# Altium PCB PCB_long_last_clock_v3_2022-12-24.pcbdoc
Units mil, origin at the board's own origin, x right, y up, seen from the top; angles counter-clockwise.
Board outline 2836.77 x 2194.41 mil, 2 copper layers (Top Layer, Bottom Layer); 34 components, 36 nets, 140 pads, 10 vias.
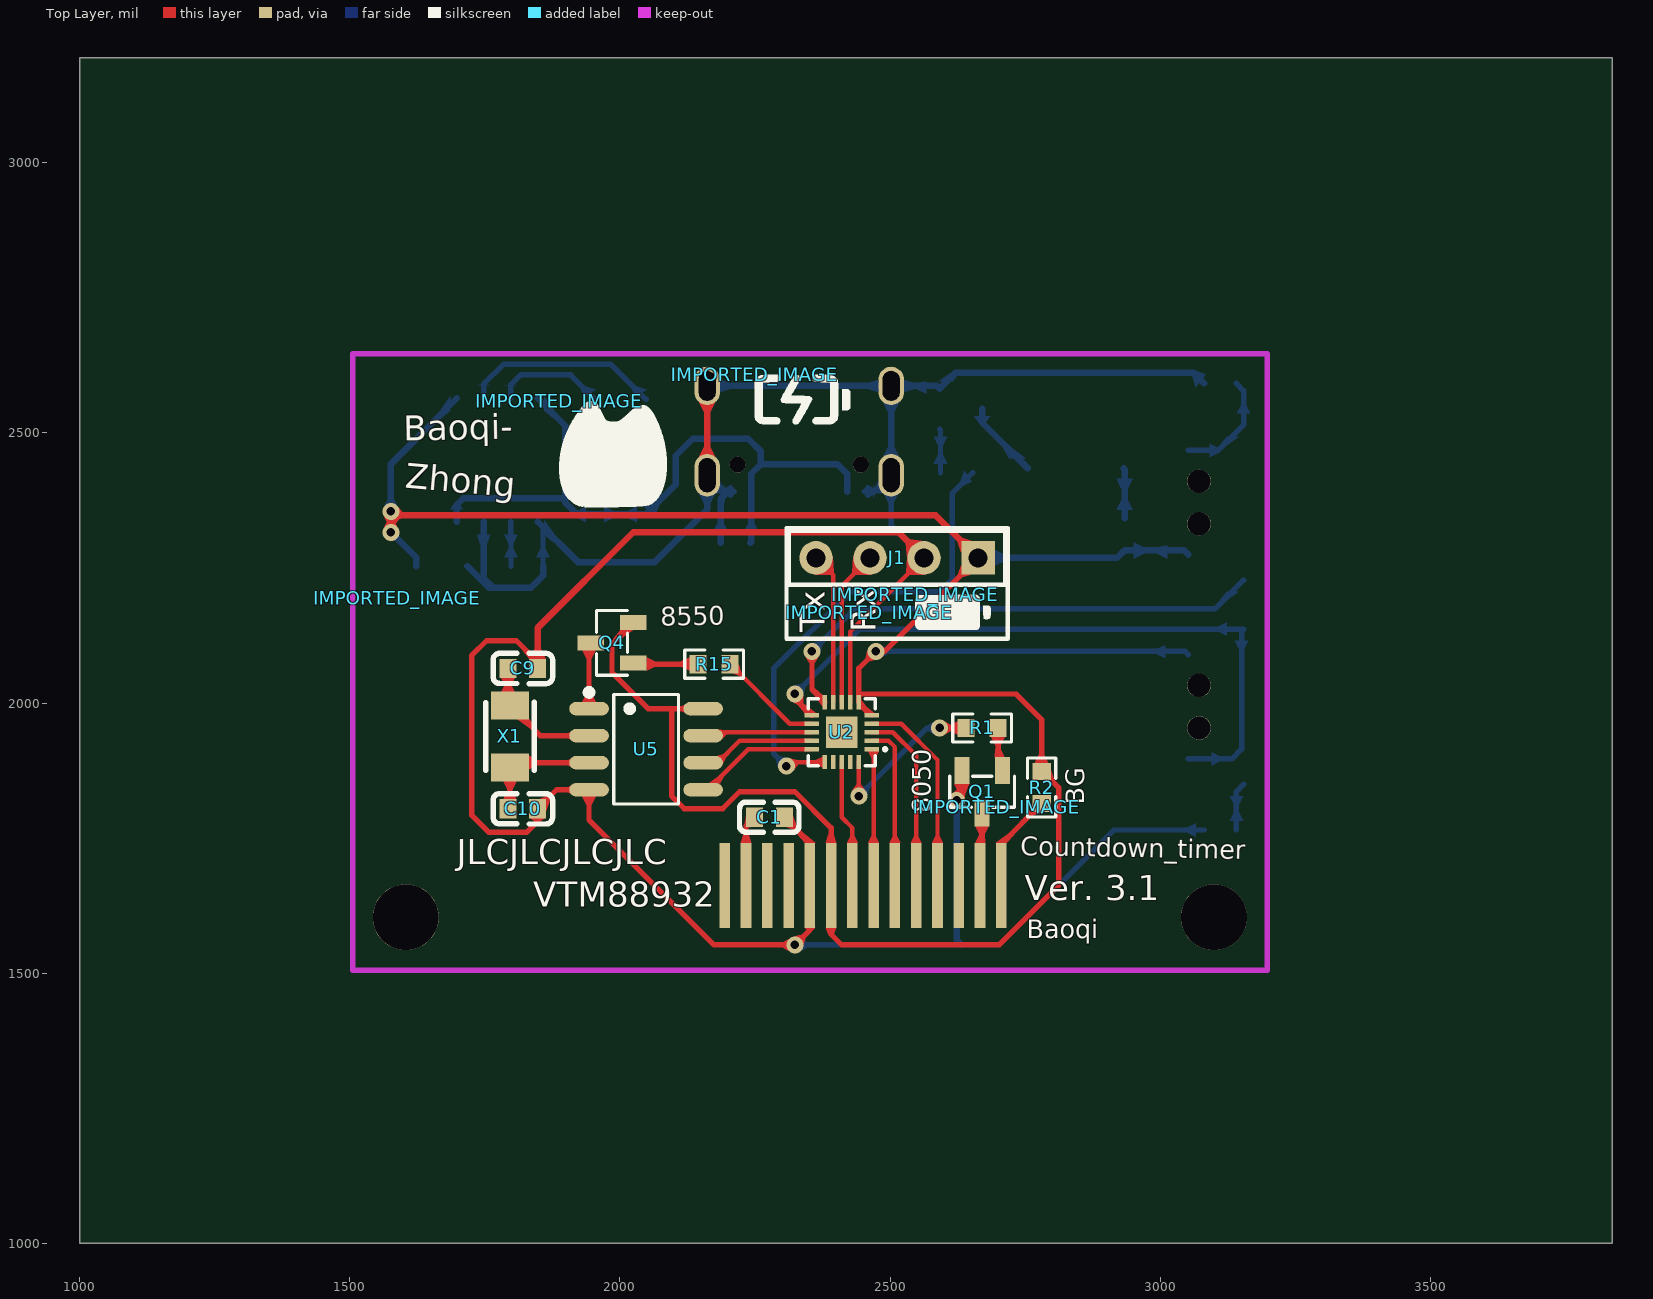
[diagram p0: Top Layer view]
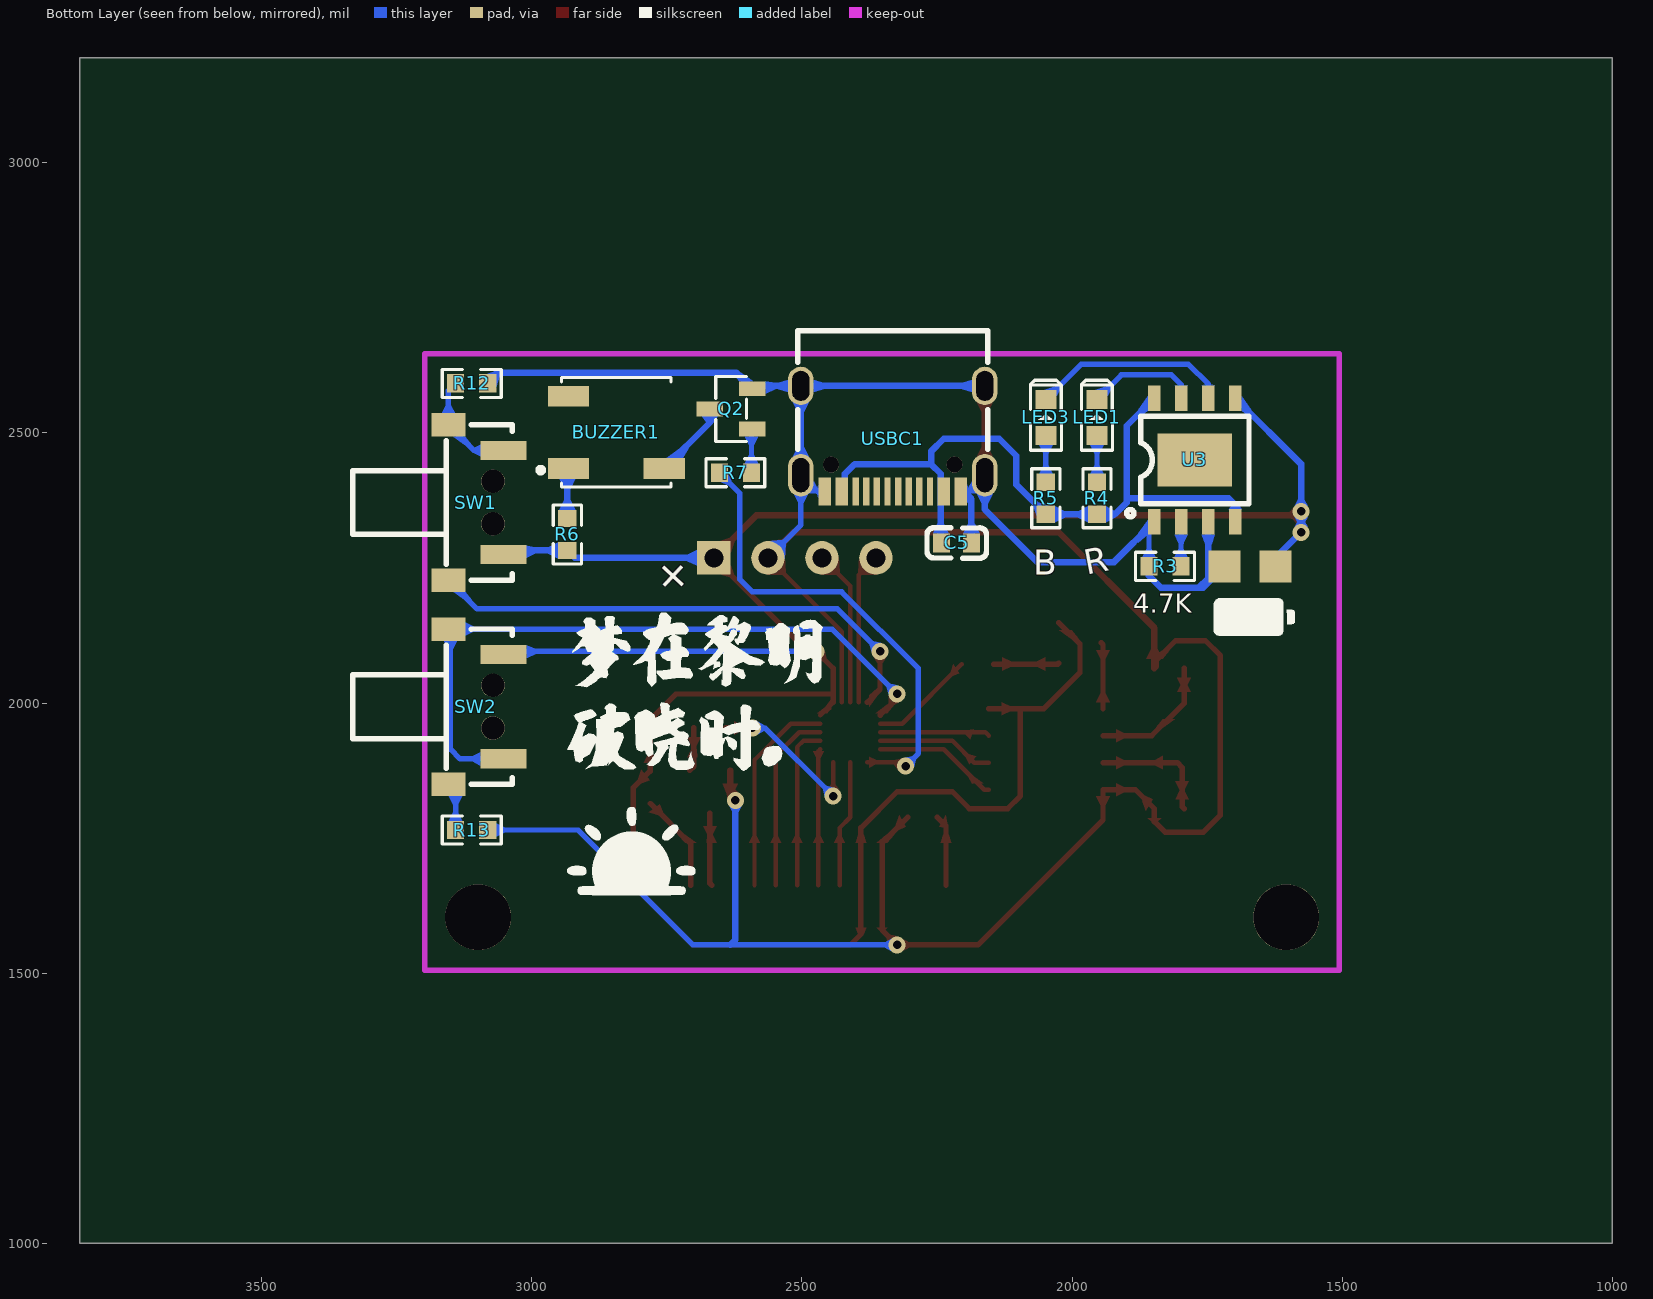
[diagram p1: Bottom Layer view, seen from below]

## Layer stack, top to bottom
Top Layer: signal copper (thickness not stored)
Dielectric: dielectric 12.6, FR-4, Dk 4.8
Bottom Layer: signal copper (thickness not stored)

## Board outline
3836.77,1000 1000,1000 1000,3194.41 3836.77,3194.41

## Components (designator, comment, footprint, x,y, rotation, side; value= is the part's Value field where it differs from the comment)
BUZZER1 "KLJ-5020" BUZ-SMD_4P-L5.0-W5.0-P3.80-TL 2843.58,2501.06 r0 bottom
C1 "0.1u" C0603#1 2276.65,1788.46 r0 top
C5 "1u" C0603#2 2213.66,2296.34 r180 bottom
C9 "6pF" C0603#1 1819.96,2064.05 r180 top
C10 "6pF" C0603#1 1819.96,1804.21 r180 top
IMPORTED_IMAGE "IMPORTED_IMAGE" IMPORTED_IMAGE 1887.54,2558.98 r0 top
IMPORTED_IMAGE "IMPORTED_IMAGE" IMPORTED_IMAGE 2546.2,2200.19 r0 top
IMPORTED_IMAGE "IMPORTED_IMAGE" IMPORTED_IMAGE 2249.09,2607.36 r0 top
IMPORTED_IMAGE "IMPORTED_IMAGE" IMPORTED_IMAGE 2461.69,2166.81 r0 top
IMPORTED_IMAGE "IMPORTED_IMAGE" IMPORTED_IMAGE 2697.36,1807.1 r0 top
IMPORTED_IMAGE "IMPORTED_IMAGE" IMPORTED_IMAGE 1587.57,2194.31 r0 top
J1 "HDR-M-2.54_1x4" HDR-M-2.54_1X4 2512.87,2268.78 r180 top
LED1 "LED-0603_R" LED0603_RED 1953.82,2528.62 r270 bottom
LED3 "LED-0603_B" LED0603_BLUE 2048.31,2528.62 r270 bottom
Q1 "S8050" SOT-23-3_L2.9-W1.3-P1.90-LS2.4-BR#1 2670.35,1835.71 r90 top
Q2 "S8050" SOT-23-3_L2.9-W1.3-P1.90-LS2.4-BR#2 2630.98,2544.37 r0 bottom
Q4 "S8550" SOT-23-3_L2.9-W1.3-P1.90-LS2.4-BR#1 1985.31,2111.3 r0 top
R1 "1k" R0603#1 2670.35,1953.82 r180 top
R2 "1k" R0603#1 2780.59,1843.58 r90 top
R3 "1k" R0603#2 1827.83,2253.03 r0 bottom
R4 "1k" R0603#2 1953.82,2379.01 r90 bottom
R5 "1k" R0603#2 2048.31,2379.01 r90 bottom
R6 "10" R0603#2 2934.13,2312.09 r270 bottom
R7 "1k" R0603#2 2623.11,2426.26 r0 bottom
R12 "1k" R0603#2 3111.3,2591.61 r0 bottom
R13 "1k" R0603#2 3111.3,1764.84 r0 bottom
R15 "1K" R0603#1 2174.29,2071.93 r0 top
SW1 "TS-B010" SW-SMD_TS-B010_8.3 3016.81,2371.14 r270 bottom
SW2 "TS-B010" SW-SMD_TS-B010_8.3 3016.81,1993.19 r270 bottom
U2 "STC8H1K08-36I-QFN20" QFN-20_L3.0-W3.0-P0.40-BL-EP1.7 2410.51,1945.94 r90 top
U3 "TP4056_C725790" ESOP-8_L4.9-W3.9-P1.27-LS6.0-BL-EP 1772.72,2449.88 r0 bottom
U5 "DS1302" SOP-8_L4.9-W3.9-P1.27-LS6.0-BL 2048.31,1914.45 r270 top
USBC1 "TYPE-C-31-M-12" USB-C_SMD-TYPE-C-31-M-12 2331.77,2489.25 r180 bottom
X1 "32.768kHz" CRYSTAL-SMD_L3.2-W1.5 1796.34,1938.07 r90 top

## Footprints (in the part's own frame and the unit in brackets; to place one, negate y for a bottom-side part, rotate by r counter-clockwise, add the part's x,y. Pads: shape width x height; smd on the part's side, far side on the other; paste and mask are expansions set on the pad)
BUZ-SMD_4P-L5.0-W5.0-P3.80-TL [mm]
  rect 1.945x0.98 smd: 1(2.248,1.7) 2(-2.247,1.7) 3(2.248,-1.7)
  silkscreen extent -2.58,-2.58 3.68,2.58
C0603#1 [mm]
  rect 0.8x0.9 smd: 1(-0.7,0) 2(0.7,0)
  silkscreen extent -1.41,-0.71 1.39,0.72
C0603#2 [mm]
  rect 0.8x0.9 smd: 1(0.7,0) 2(-0.7,0)
  silkscreen extent -1.39,-0.72 1.41,0.71
CRYSTAL-SMD_L3.2-W1.5 [mm]
  rect 1.3x1.8 smd: 1(-1.458,0) 2(1.458,0)
  silkscreen extent -1.6,-1.14 1.6,1.14
ESOP-8_L4.9-W3.9-P1.27-LS6.0-BL-EP [mm]
  rect 0.6x1.2 smd: 1(1.905,2.908) 2(0.635,2.908) 3(-0.635,2.908) 4(-1.905,2.908) 5(-1.905,-2.908) 6(-0.635,-2.908) 7(0.635,-2.908) 8(1.905,-2.908)
  rect 3.5x2.5 smd: 9(0,0)
  silkscreen extent -2.55,-2.05 3.2,2.67
HDR-M-2.54_1X4 [mil]
  rect 62x62 hole 35: 1(-150,0)
  round 62 hole 35: 2(-50,0) 3(50,0) 4(150,0)
  silkscreen extent -200,-50 200,50
IMPORTED_IMAGE [mil]
  silkscreen extent 0,-197 199,0
LED0603_BLUE [mm]
  rect 0.9x1 smd: 1(0.85,0) 2(-0.85,0)
  silkscreen extent -1.75,-0.73 1.54,0.73
LED0603_RED [mm]
  rect 0.9x1 smd: 1(0.85,0) 2(-0.85,0)
  silkscreen extent -1.75,-0.73 1.54,0.73
QFN-20_L3.0-W3.0-P0.40-BL-EP1.7 [mm]
  rect 0.2x0.665 smd: 1(-0.8,-1.407) 2(-0.4,-1.407) 3(0,-1.407) 4(0.4,-1.407) 5(0.8,-1.407) 11(0.8,1.407) 12(0.4,1.407) 13(0,1.407) 14(-0.4,1.407) 15(-0.8,1.407)
  rect 0.665x0.2 smd: 6(1.407,-0.8) 7(1.407,-0.4) 8(1.407,0) 9(1.407,0.4) 10(1.407,0.8) 16(-1.407,0.8) 17(-1.407,0.4) 18(-1.407,0) 19(-1.407,-0.4) 20(-1.407,-0.8)
  rect 1.5x1.5 smd: 21(0,0)
  silkscreen extent -1.58,-2.12 1.58,1.58
R0603#1 [mil]
  rect 31.75x34.02 smd: 1(-29.66,0) 2(29.65,0)
  silkscreen extent -55,-26 55,26
R0603#2 [mil]
  rect 31.75x34.02 smd: 1(29.65,0) 2(-29.65,0)
  silkscreen extent -55,-26 55,26
SOP-8_L4.9-W3.9-P1.27-LS6.0-BL [mm]
  oval 0.63x1.865 smd: 1(-1.905,-2.682) 2(-0.635,-2.682) 3(0.635,-2.682) 4(1.905,-2.682) 5(1.905,2.682) 6(0.635,2.682) 7(-0.635,2.682) 8(-1.905,2.682)
  silkscreen extent -2.82,-2.83 2.58,1.52
SOT-23-3_L2.9-W1.3-P1.90-LS2.4-BR#1 [mm]
  rect 1.25x0.7 smd: 1(1,-0.95) 2(1,0.95) 3(-1,0)
  silkscreen extent -0.73,-1.53 0.73,1.53
SOT-23-3_L2.9-W1.3-P1.90-LS2.4-BR#2 [mm]
  rect 1.25x0.7 smd: 1(-1,0.95) 2(-1,-0.95) 3(1,0)
  silkscreen extent -0.73,-1.53 0.73,1.53
SW-SMD_TS-B010_8.3 [mm]
  rect 0.9x2.159 smd: 1(2.45,-0.9) 2(-2.45,-0.9)
  rect 1.1x1.6 smd: 3(3.65,-3.5) 4(-3.65,-3.5)
  round 1.1 hole 1.1 unplated: ""(-1,-1.4) ""(1,-1.4)
  silkscreen extent -3.65,-8 3.65,-0.5
USB-C_SMD-TYPE-C-31-M-12 [mm]
  oval 1.2x2 hole 0.8 slot 1.6 at 90 deg: 0(-4.325,-1.716) 0(4.325,-1.716)
  oval 1.2x1.8 hole 0.8 slot 1.4 at 90 deg: 0(-4.325,2.484) 0(4.325,2.484)
  rect 0.3x1.3 smd: A1(3.35,-2.484) A4(2.55,-2.484) A5(1.25,-2.484) A6(0.25,-2.484) A7(-0.25,-2.484) A8(-1.25,-2.484) A9(-2.55,-2.484) A12(-3.35,-2.484) B1(-3.05,-2.484) B4(-2.25,-2.484) B5(-1.75,-2.484) B6(-0.75,-2.484) B7(0.75,-2.484) B8(1.75,-2.484) B9(2.25,-2.484) B12(3.05,-2.484)
  round 0.75 hole 0.75 unplated: ""(-2.9,-1.216) ""(2.9,-1.216)
  silkscreen extent -4.47,-0.5 4.47,5.08

## Free pads (board coordinates)
  rect 59.05x59.05 smd far side: 1(1623.11,2253.03) 1(1717.6,2253.03)
  rect 19.68x157.48 smd: 1(2705.79,1662.48) 2(2666.42,1662.48) 3(2627.05,1662.48) 4(2587.68,1662.48) 5(2548.3,1662.48) 6(2508.93,1662.48) 7(2469.57,1662.48) 8(2430.2,1662.48) 9(2390.82,1662.48) 10(2351.45,1662.48) 11(2312.09,1662.48) 12(2272.72,1662.48) 13(2233.34,1662.48) 14(2193.97,1662.48)
  round 122.05 hole 122.05 unplated: ""(1603.43,1603.42) ""(3099.49,1603.42)

## Via types
v1: diameter 31.5, hole 15.75, Top Layer to Bottom Layer, tented both sides, 10 vias

## Nets (pads, with @x,y where several pads share a name; then routed paths per layer and width w, separated by ;. In a path a pad name is that pad's centre, name@x,y a point inside that pad or via, vN(x,y) a via of type N, cw(c..) or ccw(c..) an arc to the next point about the centre after c; other vN are vias at no path point)
BTN1: SW1.3 U2.10 | length 957.8
  Top Layer w10: v1(2355.39,2095.55) 2355.4,2024.95 U2.10
  Bottom Layer w10: v1(2355.39,2095.55) 2434.1,2174.25 3101.5,2174.25 SW1.3
BTN2: SW2.1 SW2.4 U2.11 | length 1262.5
  Top Layer w10: v1(2323.9,2016.81) 2323.9,2008.65 U2.11
  Bottom Layer w10: v1(2323.9,2016.81) 2444,2136.85 3154.6,2136.85 3150.7,2132.95 3150.7,1914.45 3132.9,1896.75 SW2.1@3052.2,1896.75
BUZZER: R7.1 U2.16 | length 876.5
  Top Layer w8: v1@2308.1,1882.95 2315.7,1890.55 U2.16@2379,1890.55
  Bottom Layer w10: v1@2308.1,1882.95 2284.5,1906.55 2284.5,2064.05 2426.3,2205.75 2591.6,2205.75 2615.2,2229.45 2615.2,2388.75 R7.1@2652.8,2426.25
  other v1: 2308.15,1882.95
BUZZER1_1: BUZZER1.1 R6.2 | length 93.2
  Bottom Layer w12: BUZZER1.1@2932.1,2434.15 2934.1,2432.05 R6.2@2934.1,2341.75
BUZZER1_2: BUZZER1.2 Q2.3 | length 145.3
  Bottom Layer w12: Q2.3 2670.4,2518.85 BUZZER1.2@2755.1,2434.15
C1_1: C1.1 pad.13 | length 132.6
  Top Layer w10: pad.13@2233.3,1662.45 2233.3,1772.75 C1.1@2249.1,1788.45
C9_2: C9.2 U5.2 X1.2 | length 239.8
  Top Layer w10: C9.2@1792.4,2064.05 1792.4,1999.45 1796.3,1995.45 1852.4,1939.45 U5.2
C10_2: C10.2 U5.3 X1.1 | length 228.1
  Top Layer w10: C10.2 1796.3,1808.15 1796.3,1880.65 1805.1,1889.45 U5.3
DS1302_CE: U2.15 U5.5 | length 232.3
  Top Layer w8: U5.5 2162.3,1839.45 2237.3,1914.45 U2.15
DS1302_CLK: U2.13 U5.7 | length 203.9
  Top Layer w8: U5.7 2160.4,1945.95 U2.13@2355.1,1945.95
DS1302_DAT: U2.14 U5.6 | length 218.1
  Top Layer w8: U5.6 2180.8,1889.45 2221.5,1930.15 U2.14
DS1302_VCC: R15.2 U2.12 | length 196.8
  Top Layer w8: R15.2@2204,2071.95 2314.2,1961.65 U2.12@2355.1,1961.65
GND: C1.2 C5.1 C9.1 C10.1 J1.2 pad.1@1717.6,2253.03 pad.10 Q1.2 Q2.2 R3.1 R12.2 R13.2 U2.7 U3.1 U3.3 U5.4 USBC1.0 USBC1.A1 USBC1.A12 USBC1.B1 USBC1.B12 | length 6512
  Top Layer w8: U2.7 2426.3,2132.15 J1.2
  Top Layer w10: C9.1@1847.5,2064.05 1843.6,2067.95 1843.6,2079.85 1808.1,2115.25 1753,2115.25 1725.5,2087.65 1725.5,1792.45 1757,1760.95 1827.8,1760.95 1847.5,1780.55 C10.1 1882.8,1839.45 U5.4 1942.7,1783.85 2174.3,1552.25 v1(2323.9,1552.24) 2351.5,1579.75 2351.5,1662.45 2351.5,1741.25 C1.2@2304.2,1788.45
  Top Layer w12: C9.1@1847.5,2064.05 1847.5,2138.85 2024.7,2316.05 2515.6,2316.05 J1.2 ; USBC1.0@2161.5,2421.65 USBC1.0@2161.5,2587.05 ; v1(2623.11,1819.96) 2633,1829.85 Q1.2@2633,1875.05
  Bottom Layer w10: U3.1 1857.5,2325.65 R3.1 ; USBC1.0@2161.5,2421.65 2191.7,2391.45 USBC1.B12 ; v1(2323.9,1552.24) 2701.8,1552.25 2914.4,1764.85 R13.2 ; USBC1.B1@2451.9,2391.45 2471.8,2391.45 2502.1,2421.65 2502.1,2329.65 J1.2
  Bottom Layer w12: pad.1@1717.6,2253.03 1756.98,2213.65 1835.7,2213.65 ; U3.3 1747.7,2230.75 1764.8,2213.65 1835.7,2213.65 ; U3.1 1922.2,2260.95 2064.1,2260.95 2161.5,2358.35 USBC1.0@2161.5,2421.65 ; R3.1 1857.5,2235.45 1835.7,2213.65 ; USBC1.0@2161.5,2587.05 USBC1.0@2502.1,2587.05 ; C5.1@2186.1,2296.35 2186.1,2377.65 USBC1.A1@2199.9,2391.45 ; USBC1.0@2502.1,2421.65 USBC1.0@2502.1,2587.05 ; v1(2623.11,1819.96) 2623.11,1561.66 2632.53,1552.24 ; R12.2 3061.9,2611.25 2621.1,2611.25 Q2.2 2586.3,2587.05 USBC1.0@2502.1,2587.05
LED1_2: LED1.2 U3.7 | length 207.1
  Bottom Layer w10: U3.7 1797.7,2589.05 1816,2607.35 1908.5,2607.35 LED1.2@1953.8,2562.05
LED3_1: LED3.1 R5.1 | length 86.5
  Bottom Layer w10: R5.1@2048.3,2408.65 LED3.1
LED3_2: LED3.2 U3.6 | length 368.7
  Bottom Layer w10: U3.6 1747.7,2590.25 1784.5,2627.05 1983.3,2627.05 LED3.2@2048.3,2562.05
Q1_3: pad.2 Q1.3 | length 135.6
  Top Layer w10: pad.2@2666.4,1662.45 2670.4,1666.45 Q1.3@2670.4,1796.35
Q2_1: Q2.1 R7.2 | length 81.4
  Bottom Layer w10: Q2.1 2593.4,2505.15 R7.2@2593.4,2426.25
Q4_3: Q4.3 U5.1 | length 123.1
  Top Layer w10: U5.1 1942.7,2108.05 Q4.3@1945.9,2111.25
R1_1: Q1.1 R1.1 | length 82
  Top Layer w10: R1.1 2700,1882.85 Q1.1@2707.8,1875.05
R2_1: pad.1@2705.79,1662.48 R2.1 | length 182.5
  Top Layer w10: pad.1@2705.8,1662.45 2705.8,1739.15 R2.1@2780.6,1813.95
R3_2: R3.2 U3.2 | length 82.3
  Bottom Layer w10: U3.2 R3.2
R4_1: LED1.1 R4.1 | length 86.5
  Bottom Layer w10: R4.1@1953.8,2408.65 LED1.1
R15_1: Q4.1 R15.1 | length 120.7
  Top Layer w10: Q4.1@2024.7,2073.85 2026.7,2071.95 R15.1@2144.6,2071.95
RX: J1.3 U2.8 | length 289.1
  Top Layer w8: U2.8 2410.5,2216.45 J1.3
SCREEN_BG: R1.2 U2.20 | length 313.6
  Top Layer w8: v1(2442.01,1827.83) U2.20@2442,1890.55
  Top Layer w10: v1(2591.61,1953.82) R1.2
  Bottom Layer w10: v1(2442.01,1827.83) 2568,1953.82 v1(2591.61,1953.82)
SCREEN_CS: pad.4 U2.4 | length 381.8
  Top Layer w8: U2.4@2465.9,1961.65 2520.7,1961.65 2587.7,1894.75 pad.4@2587.7,1662.45
SCREEN_DC: pad.6 U2.2 | length 303.8
  Top Layer w8: U2.2 2497.1,1930.15 2508.9,1918.35 pad.6@2508.9,1662.45
SCREEN_RST: pad.5 U2.3 | length 340.5
  Top Layer w8: U2.3@2465.9,1945.95 2505,1945.95 2548.3,1902.65 pad.5@2548.3,1662.45
SCREEN_SCL: pad.7 U2.1 | length 253.6
  Top Layer w8: U2.1 2469.6,1910.85 pad.7@2469.6,1662.45
SCREEN_SDA: pad.8 U2.18 | length 236.3
  Top Layer w8: U2.18@2410.5,1890.55 2410.5,1788.45 2430.2,1768.75 pad.8@2430.2,1662.45
SW1_2: R12.1 SW1.2 SW1.4 | length 204.4
  Bottom Layer w10: SW1.2 3107.4,2467.65 SW1.4 3154.6,2577.95 R12.1
SW2_3: R13.1 SW2.3 | length 90.2
  Bottom Layer w10: R13.1 3141,1835.85 SW2.3@3154.6,1849.45
TX: J1.4 U2.9 | length 280.6
  Top Layer w8: J1.4 2394.8,2236.85 U2.9
VBAT: J1.1 pad.1@1623.11,2253.03 pad.9 Q4.2 R2.2 R6.1 SW1.1 SW2.2 U2.5 U2.6 U3.5 U5.8 | length 5141.8
  Top Layer w8: U2.6 U2.5
  Top Layer w10: Q4.2@2024.7,2148.65 1985.3,2109.35 1985.3,2056.15 2052,1989.45 U5.8 ; 2095.5,1989.45 2095.5,1827.85 2119.2,1804.25 2190.1,1804.25 2221.6,1835.75 2323.9,1835.75 2390.8,1768.85 2390.8,1662.45 2390.8,1571.95 2410.5,1552.25 2701.8,1552.25 2812.1,1662.45 2812.1,1843.55 2782.4,1873.25 R2.2 2780.6,1969.55 2733.4,2016.75 2442,2016.75 ; U2.6 2442,2064.05 v1(2473.5,2095.55) 2489.6,2095.55 J1.1
  Top Layer w12: v1(1575.87,2315.96) v1(1575.87,2354.63) 1582.94,2347.55 1607.4,2347.55 ; v1(1575.87,2315.96) 1575.9,2331.75 1591.6,2347.55 2584.1,2347.55 J1.1
  Bottom Layer w10: v1(2473.5,2095.55) 3046.3,2095.55 SW2.2
  Bottom Layer w12: v1(1575.87,2315.96) v1(1575.87,2354.63) ; v1(1575.87,2315.96) 1623.11,2268.74 pad.1@1623.11,2253.03 ; v1(1575.87,2354.63) 1575.9,2442.55 U3.5 ; J1.1 2920.5,2268.75 R6.1 3044.5,2282.45 SW1.1@3052.2,2274.65
VIN: C5.2 R4.2 R5.2 U3.4 U3.8 USBC1.A4 USBC1.A9 USBC1.B4 USBC1.B9 | length 1299.3
  Bottom Layer w12: U3.4 1697.7,2367.05 1709.7,2379.05 1898.7,2379.05 ; U3.8 1898.7,2513.35 1898.7,2371.15 1920.5,2349.35 R4.2 R5.2 2103.4,2404.45 2103.4,2457.75 2134.9,2489.25 2237.3,2489.25 2260.9,2465.65 2260.9,2442.05 ; C5.2@2241.2,2296.35 2243.2,2298.35 USBC1.B9 2243.2,2424.25 2260.9,2442.05 ; USBC1.B4@2420.4,2391.45 2420.4,2424.25 2402.6,2442.05 2260.9,2442.05
pads on no net: BUZZER1.3 SW1. SW2. U2.17 U2.19 U2.21 U3.9 USBC1. USBC1.A5 USBC1.A6 USBC1.A7 USBC1.A8 USBC1.B5 USBC1.B6 USBC1.B7 USBC1.B8

## Other copper
Top Layer:
  region net GND: 2531.93,2266.84 2564.81,2299.72 2537.27,2302.86 2528.79,2294.38
  region net GND: 2531.93,2270.72 2564.81,2237.84 2535.85,2236.11 2530.2,2241.76
  region net RX: 2431.93,2270.72 2464.81,2237.84 2435.85,2236.11 2430.2,2241.76
  region net TX: 2360.93,2237.84 2393.81,2270.72 2395.54,2241.76 2389.89,2236.11
  region net SCREEN_BG: 2602.03,1942.01 2602.03,1965.63 2613.05,1958.82 2613.05,1948.82
  region net SCREEN_BG: 2453.82,1838.25 2430.2,1838.25 2438.01,1849.28 2446.01,1849.28
  region net BTN1: 2367.2,2085.13 2343.58,2085.13 2350.39,2074.11 2360.39,2074.11
  region net BTN2: 2318.72,2001.94 2339.3,2013.53 2338.94,2000.67 2329.89,1995.58
  region net VBAT: 1587.68,2344.21 1564.06,2344.21 1569.87,2333.19 1581.87,2333.19
  region net VBAT: 1589.6,2362.34 1581.8,2340.04 1594.01,2341.55 1598.2,2353.55
  region net VBAT: 1587.68,2326.38 1564.06,2326.38 1569.87,2331.77 1581.87,2331.77
  region net VBAT: 1587.68,2326.38 1564.06,2326.38 1569.87,2337.4 1581.87,2337.4
  region net BUZZER: 2322.07,1875.59 2313.72,1897.68 2326.69,1894.53 2329.72,1886.53
  region net GND: 2339.61,1551.25 2322.91,1567.96 2335.53,1570.94 2342.6,1563.86
  region net GND: 2313.48,1540.43 2313.48,1564.05 2302.46,1557.24 2302.46,1547.24
  region net VBAT: 2483.92,2083.74 2483.92,2107.36 2489.64,2100.55 2489.64,2090.55
  region net VBAT: 2474.49,2079.83 2457.78,2096.54 2454.8,2083.93 2461.88,2076.85
  region net GND: 2617.4,1834.64 2638.39,1823.79 2638.95,1835.9 2626.95,1842.11
  region net C1_1: 2223.5,1741.22 2243.19,1741.22 2238.34,1756.22 2228.34,1756.22
  region net GND: 2361.29,1583.74 2341.61,1583.74 2346.46,1579.8 2356.46,1579.8
  region net GND: 2341.61,1741.22 2361.29,1741.22 2343.52,1756.22 2329.37,1756.22
  region net VBAT: 2400.66,1583.74 2380.98,1583.74 2385.83,1571.92 2395.83,1571.92
  region net VBAT: 2380.98,1741.22 2400.66,1741.22 2395.8,1756.22 2385.8,1756.22
  region net SCREEN_SDA: 2420.35,1741.22 2440.03,1741.22 2434.2,1753.22 2426.2,1753.22
  region net SCREEN_SCL: 2459.72,1741.22 2479.4,1741.22 2473.57,1753.22 2465.57,1753.22
  region net SCREEN_DC: 2499.09,1741.22 2518.77,1741.22 2512.93,1753.22 2504.93,1753.22
  region net SCREEN_RST: 2538.46,1741.22 2558.14,1741.22 2552.3,1753.22 2544.3,1753.22
  region net SCREEN_CS: 2577.83,1741.22 2597.51,1741.22 2591.67,1753.22 2583.67,1753.22
  region net Q1_3: 2657.85,1741.22 2676.25,1741.22 2675.35,1756.22 2665.35,1756.22
  region net R2_1: 2695.94,1741.22 2715.62,1741.22 2729.96,1756.22 2715.82,1756.22
  region net GND: 2319.96,1792.51 2307.65,1770.75 2321.26,1764.34 2326.37,1773.37
  region net C1_1: 2245.64,1770.75 2233.34,1792.52 2230.79,1777.23 2236.88,1769.18
  region net C9_2: 1804.9,2046.34 1779.9,2046.34 1787.4,2031.34 1797.4,2031.34
  region net GND: 1831.77,2081.77 1854.11,2081.77 1833.68,2096.77 1819.54,2096.77
  region net GND: 1832.52,2081.77 1862.52,2081.77 1853.52,2099.77 1841.52,2099.77
  region net C10_2: 1783.84,1821.93 1808.15,1821.93 1801.34,1836.93 1791.34,1836.93
  region net GND: 1860.02,1786.49 1835.02,1786.49 1842.52,1780.59 1852.52,1780.59
  region net GND: 1850.99,1821.93 1863.27,1800.15 1869.69,1819.31 1864.59,1828.35
  region net VBAT: 2649.55,2237.78 2631.87,2255.46 2626.57,2239.55 2633.64,2232.48
  region net VBAT: 2631.87,2278.57 2653.09,2299.78 2633.99,2306.14 2625.51,2297.66
  region net R1_1: 2693.97,1899.68 2712.51,1899.68 2705.01,1914.68 2695.01,1914.68
  region net GND: 2646.73,1850.47 2619.17,1850.47 2626.95,1832.47 2638.95,1832.47
  region net Q1_3: 2682.85,1771.73 2657.85,1771.73 2665.35,1756.73 2675.35,1756.73
  region net R15_1: 2049.29,2084.43 2049.29,2060.12 2064.29,2066.93 2064.29,2076.93
  region net VBAT: 2023.4,2134.92 2000.08,2134.92 1988.83,2119.92 2002.98,2119.92
  region net Q4_3: 1955.2,2097.52 1930.2,2097.52 1937.7,2082.52 1947.7,2082.52
  region net SCREEN_BG: 2624.82,1941.32 2624.82,1966.32 2609.82,1958.82 2609.82,1948.82
  region net R1_1: 2687.51,1936.81 2712.51,1936.81 2705.01,1921.81 2695.01,1921.81
  region net VBAT: 2768.09,1889.11 2793.09,1889.11 2785.59,1904.11 2775.59,1904.11
  region net VBAT: 2797.6,1876.71 2781.77,1857.36 2796.69,1851.91 2803.05,1859.69
  region net R2_1: 2783.84,1798.05 2763.58,1812.7 2757.89,1798.3 2766.1,1792.37
  region net DS1302_VCC: 2219.82,2071.57 2208.74,2054.92 2220.02,2050.2 2224.54,2057
  region net R15_1: 2128.76,2084.43 2128.76,2059.43 2113.76,2066.93 2113.76,2076.93
  region net SCREEN_SCL: 2479.01,1910.51 2459.57,1910.51 2465.57,1898.51 2473.57,1898.51
  region net VBAT: 2452.83,1981.38 2471.98,1981.38 2455.64,1993.38 2444.33,1993.38
  region net VBAT: 2445.95,2007.42 2445.95,1988.26 2457.95,1979.76 2457.95,1991.07
  region net BTN1: 2375.07,1992.79 2375.07,2014.44 2360.07,2027.36 2360.07,2013.22
  region net BTN2: 2342.01,1981.38 2363.66,1981.38 2343.23,1996.38 2329.09,1996.38
  region net BUZZER: 2375.07,1880.53 2375.07,1900.53 2363.07,1894.53 2363.07,1886.53
  region net C10_2: 1808.84,1855.08 1783.84,1855.08 1791.34,1840.08 1801.34,1840.08
  region net C10_2: 1831.77,1901.95 1831.77,1876.95 1846.77,1884.45 1846.77,1894.45
  region net C9_2: 1779.9,2021.06 1804.9,2021.06 1797.4,2036.06 1787.4,2036.06
  region net C9_2: 1831.77,1969.88 1809.43,1969.88 1829.86,1954.88 1844,1954.88
  region net Q4_3: 1930.2,2001.85 1955.2,2001.85 1947.7,2016.85 1937.7,2016.85
  region net C9_2: 1918.38,1927.05 1918.38,1951.85 1903.38,1944.45 1903.38,1934.45
  region net C10_2: 1918.38,1877.05 1918.38,1901.85 1903.38,1894.45 1903.38,1884.45
  region net GND: 1955.2,1827.05 1930.2,1827.05 1937.7,1812.05 1947.7,1812.05
  region net GND: 1918.38,1827.05 1918.38,1851.85 1903.38,1844.45 1903.38,1834.45
  region net VBAT: 2129.6,1977.05 2129.6,2001.85 2114.6,1994.45 2114.6,1984.45
  region net DS1302_CLK: 2188.49,1932.49 2181.78,1951.33 2195.01,1949.94 2197.87,1941.94
  region net DS1302_DAT: 2190.25,1886.43 2177.5,1901.83 2190.56,1904.88 2195.68,1898.69
  region net DS1302_CE: 2164.68,1851.85 2184.61,1850.08 2192.34,1863.85 2181.03,1863.85
  region net GND: 2176.49,2455.7 2146.49,2455.7 2155.49,2473.7 2167.49,2473.7
  region net GND: 2176.49,2556.99 2146.49,2556.99 2155.49,2538.99 2167.49,2538.99
Bottom Layer:
  region net GND: 2531.93,2266.84 2564.81,2299.72 2536.56,2302.16 2529.49,2295.09
  region net SCREEN_BG: 2581.2,1942.01 2581.2,1965.63 2570.17,1958.82 2570.17,1948.82
  region net SCREEN_BG: 2457.73,1826.85 2441.03,1843.55 2453.64,1846.53 2460.71,1839.46
  region net BTN1: 2371.11,2094.56 2354.4,2111.27 2367.02,2114.25 2374.09,2107.17
  region net BTN2: 2339.61,2015.82 2322.91,2032.53 2335.52,2035.5 2342.59,2028.43
  region net VBAT: 1587.68,2365.04 1564.06,2365.04 1569.87,2376.07 1581.87,2376.07
  region net VBAT: 1587.68,2344.21 1564.06,2344.21 1569.87,2333.19 1581.87,2333.19
  region net VBAT: 1587.68,2326.38 1564.06,2326.38 1569.87,2337.4 1581.87,2337.4
  region net BUZZER: 2309.13,1898.67 2292.43,1881.96 2289.45,1894.58 2296.52,1901.65
  region net GND: 2334.32,1564.05 2334.31,1540.43 2345.34,1547.24 2345.34,1557.24
  region net VBAT: 2483.92,2083.74 2483.92,2107.36 2494.94,2100.55 2494.94,2090.55
  region net GND: 2634.92,1809.54 2611.3,1809.54 2617.11,1798.52 2629.11,1798.52
  region net VBAT: 2693.87,2283.78 2693.87,2253.78 2711.87,2262.78 2711.87,2274.78
  region net BUZZER1_1: 2919.13,2414.84 2949.13,2414.84 2940.13,2396.84 2928.13,2396.84
  region net BUZZER1_2: 2720.82,2453.42 2750.82,2453.42 2726.3,2471.42 2709.33,2471.42
  region net Q2_1: 2580.95,2493.19 2605.95,2493.19 2598.45,2478.19 2588.45,2478.19
  region net GND: 2616.22,2595.55 2590.39,2595.55 2612.66,2611.3 2625.39,2607.05
  region net GND: 2567.01,2595.55 2567.01,2572.05 2549.01,2581.05 2549.01,2593.05
  region net BUZZER1_2: 2655.35,2530.59 2685.35,2530.59 2676.35,2518.89 2664.35,2518.89
  region net BUZZER1_1: 2949.13,2357.62 2919.13,2357.62 2928.13,2375.62 2940.13,2375.62
  region net VBAT: 2951.14,2297.42 2951.14,2267.42 2969.14,2276.42 2969.14,2288.42
  region net Q2_1: 2605.95,2443.27 2580.95,2443.27 2588.45,2458.27 2598.45,2458.27
  region net BUZZER: 2651.56,2409.25 2636.89,2429.49 2631.21,2411.77 2637.15,2403.57
  region net VIN: 2256.97,2314.05 2228.19,2314.05 2237.19,2332.05 2249.19,2332.05
  region net GND: 2201.1,2314.05 2171.1,2314.05 2180.1,2332.05 2192.1,2332.05
  region net LED1_2: 1934.13,2567.52 1955.91,2579.8 1936.76,2586.22 1927.71,2581.12
  region net R4_1: 1941.32,2477.44 1966.32,2477.44 1958.82,2462.44 1948.82,2462.44
  region net LED3_2: 2028.62,2567.52 2050.4,2579.8 2031.24,2586.22 2022.2,2581.12
  region net LED3_1: 2035.81,2477.44 2060.81,2477.44 2053.31,2462.44 2043.31,2462.44
  region net R3_2: 1810.58,2270.04 1785.58,2270.04 1793,2285.04 1803,2285.04
  region net GND: 1872.5,2236.02 1842.5,2236.02 1851.5,2235.45 1863.5,2235.45
  region net GND: 1845,2270.04 1870,2270.04 1862.5,2285.04 1852.5,2285.04
  region net VIN: 1936.81,2364.35 1936.81,2334.35 1920.49,2343.35 1920.49,2355.35
  region net VIN: 1970.83,2334.35 1970.83,2364.35 1988.83,2355.35 1988.83,2343.35
  region net R4_1: 1941.32,2424.54 1966.32,2424.54 1958.82,2439.54 1948.82,2439.54
  region net VIN: 2041.49,2365.24 2065.31,2347 2071.99,2364.56 2062.38,2371.91
  region net VIN: 2031.3,2364.35 2031.3,2334.35 2013.3,2343.35 2013.3,2355.35
  region net LED3_1: 2035.81,2424.54 2060.81,2424.54 2053.31,2439.54 2043.31,2439.54
  region net GND: 3065.77,2584.77 3083.96,2608.62 3066.42,2615.31 3059.08,2605.68
  region net GND: 3065.77,1777.34 3065.77,1752.34 3050.77,1759.84 3050.77,1769.84
  region net SW2_3: 3128.46,1781.85 3153.46,1781.85 3145.96,1796.85 3135.96,1796.85
  region net BTN1: 3145.45,2205.79 3123.1,2205.79 3110.88,2190.79 3125.02,2190.79
  region net SW1_2: 3142.1,2536.49 3167.1,2536.49 3159.6,2551.49 3149.6,2551.49
  region net SW1_2: 3145.45,2493.19 3123.1,2493.19 3110.87,2478.19 3125.02,2478.19
  region net VBAT: 3012.87,2267.42 3012.87,2292.4 2994.87,2288.42 2994.87,2276.42
  region net SW1_2: 3091.61,2480.1 3091.61,2455.1 3106.61,2462.6 3106.61,2472.6
  region net SW2_3: 3153.46,1827.84 3128.46,1827.84 3135.96,1812.84 3145.96,1812.84
  region net BTN2: 3123.1,2124.39 3123.1,2149.39 3108.1,2141.89 3108.1,2131.89
  region net BTN2: 3163.16,2115.24 3138.16,2115.24 3145.66,2100.24 3155.66,2100.24
  region net BTN2: 3095.55,1909.23 3095.55,1884.23 3110.55,1891.73 3110.55,1901.73
  region net VBAT: 3008.93,2083.05 3008.93,2107.36 2993.93,2100.55 2993.93,2090.55
  region net GND: 1859.53,2311.76 1859.53,2338.57 1877.53,2314.05 1877.53,2297.08
  region net R3_2: 1785.91,2311.76 1809.53,2311.76 1802.93,2296.76 1792.93,2296.76
  region net GND: 1735.91,2311.76 1759.53,2311.76 1753.71,2293.76 1741.71,2293.76
  region net VIN: 1709.53,2359 1685.91,2359 1691.7,2367.05 1703.7,2367.05
  region net VBAT: 1685.91,2567.57 1685.91,2540.76 1667.91,2526.09 1667.91,2543.06
  region net LED3_2: 1759.53,2588 1735.91,2588 1742.71,2590.23 1752.71,2590.23
  region net LED1_2: 1809.53,2588 1785.91,2588 1792.71,2589.05 1802.71,2589.05
  region net VIN: 1859.53,2540.76 1859.53,2567.57 1877.53,2543.06 1877.53,2526.09
  region net GND: 2193.98,2400.55 2193.98,2370.55 2190.34,2373.43 2186.1,2386.15
  region net GND: 2193.98,2403.95 2193.98,2378.95 2191.74,2386.45 2191.74,2396.45
  region net GND: 2205.79,2378.95 2205.79,2403.95 2211.69,2396.45 2211.69,2386.45
  region net GND: 2205.79,2403.95 2205.79,2378.95 2191.74,2386.45 2191.74,2396.45
  region net GND: 2457.75,2378.95 2457.75,2403.95 2471.8,2396.45 2471.8,2386.45
  region net GND: 2469.57,2378.95 2469.57,2403.95 2471.8,2396.45 2471.8,2386.45
  region net GND: 2457.75,2403.95 2457.75,2378.95 2451.85,2386.45 2451.85,2396.45
  region net GND: 2525.67,2598.86 2525.67,2575.24 2543.67,2581.05 2543.67,2593.05
  region net GND: 2478.43,2575.24 2478.43,2598.86 2460.43,2593.05 2460.43,2581.05
  region net GND: 2517.05,2556.99 2487.05,2556.99 2496.05,2538.99 2508.05,2538.99
  region net GND: 2517.05,2455.7 2487.05,2455.7 2496.05,2473.7 2508.05,2473.7
  region net GND: 2514.55,2385.91 2489.55,2385.91 2497.05,2370.91 2507.05,2370.91
  region net GND: 2487.55,2387.3 2478.43,2410.58 2471.8,2398.52 2475.34,2387.91
  region net GND: 2176.49,2387.7 2146.49,2387.7 2155.49,2369.7 2167.49,2369.7
  region net GND: 2185.11,2410.58 2175.99,2387.3 2188.21,2387.91 2191.74,2398.52
  region net GND: 2185.11,2598.86 2185.11,2575.24 2203.11,2581.05 2203.11,2593.05

## Silkscreen, mask and mechanical layers (free items; w line width, h text height)
Top Overlay:
  lines w8: 2308.16,2119.17 2717.6,2119.17 2717.6,2323.89 2308.16,2323.89 2308.16,2119.17
  text "Baoqi-" at 1599.49,2469.56 h80 r1
  text "Zhong" at 1599.49,2382.95 h80 r355
  text "8550" at 2075.87,2130.98 h59.05 r1
  text "Tx" at 2394.76,2130.98 h80 r90
  text "Rx" at 2489.25,2130.98 h80 r90
  text "BG" at 2871.14,1812.09 h59.05 r90
  text "8050" at 2587.68,1796.34 h59.05 r90
  text "Countdown_timer" at 2741.22,1705.79 h59.05 r359
  text "JLCJLCJLCJLC" at 1697.91,1686.1 h78.74
  text "Ver. 3.1" at 2749.09,1619.17 h78.74
  text "VTM88932" at 1839.65,1607.36 h78.74
  text "Baoqi" at 2753.03,1552.24 h59.05
Bottom Overlay:
  text "+" at 2792.4,2225.47 h100 r43
  text "R" at 1969.57,2221.53 h80 r349
  text "B" at 2071.93,2221.53 h80
  text "4.7K" at 1886.89,2154.6 h60